# Altium PCB Sensor.PcbDoc (part 3 of 3)
Units mil, origin at the board's own origin, x right, y up, seen from the top; angles counter-clockwise.
Board outline 4000 x 3000 mil, 2 copper layers (Top Layer, Bottom Layer); 1202 components, 71 nets, 2560 pads, 0 vias.
Unrouted connection lines stored in the file: 2489.
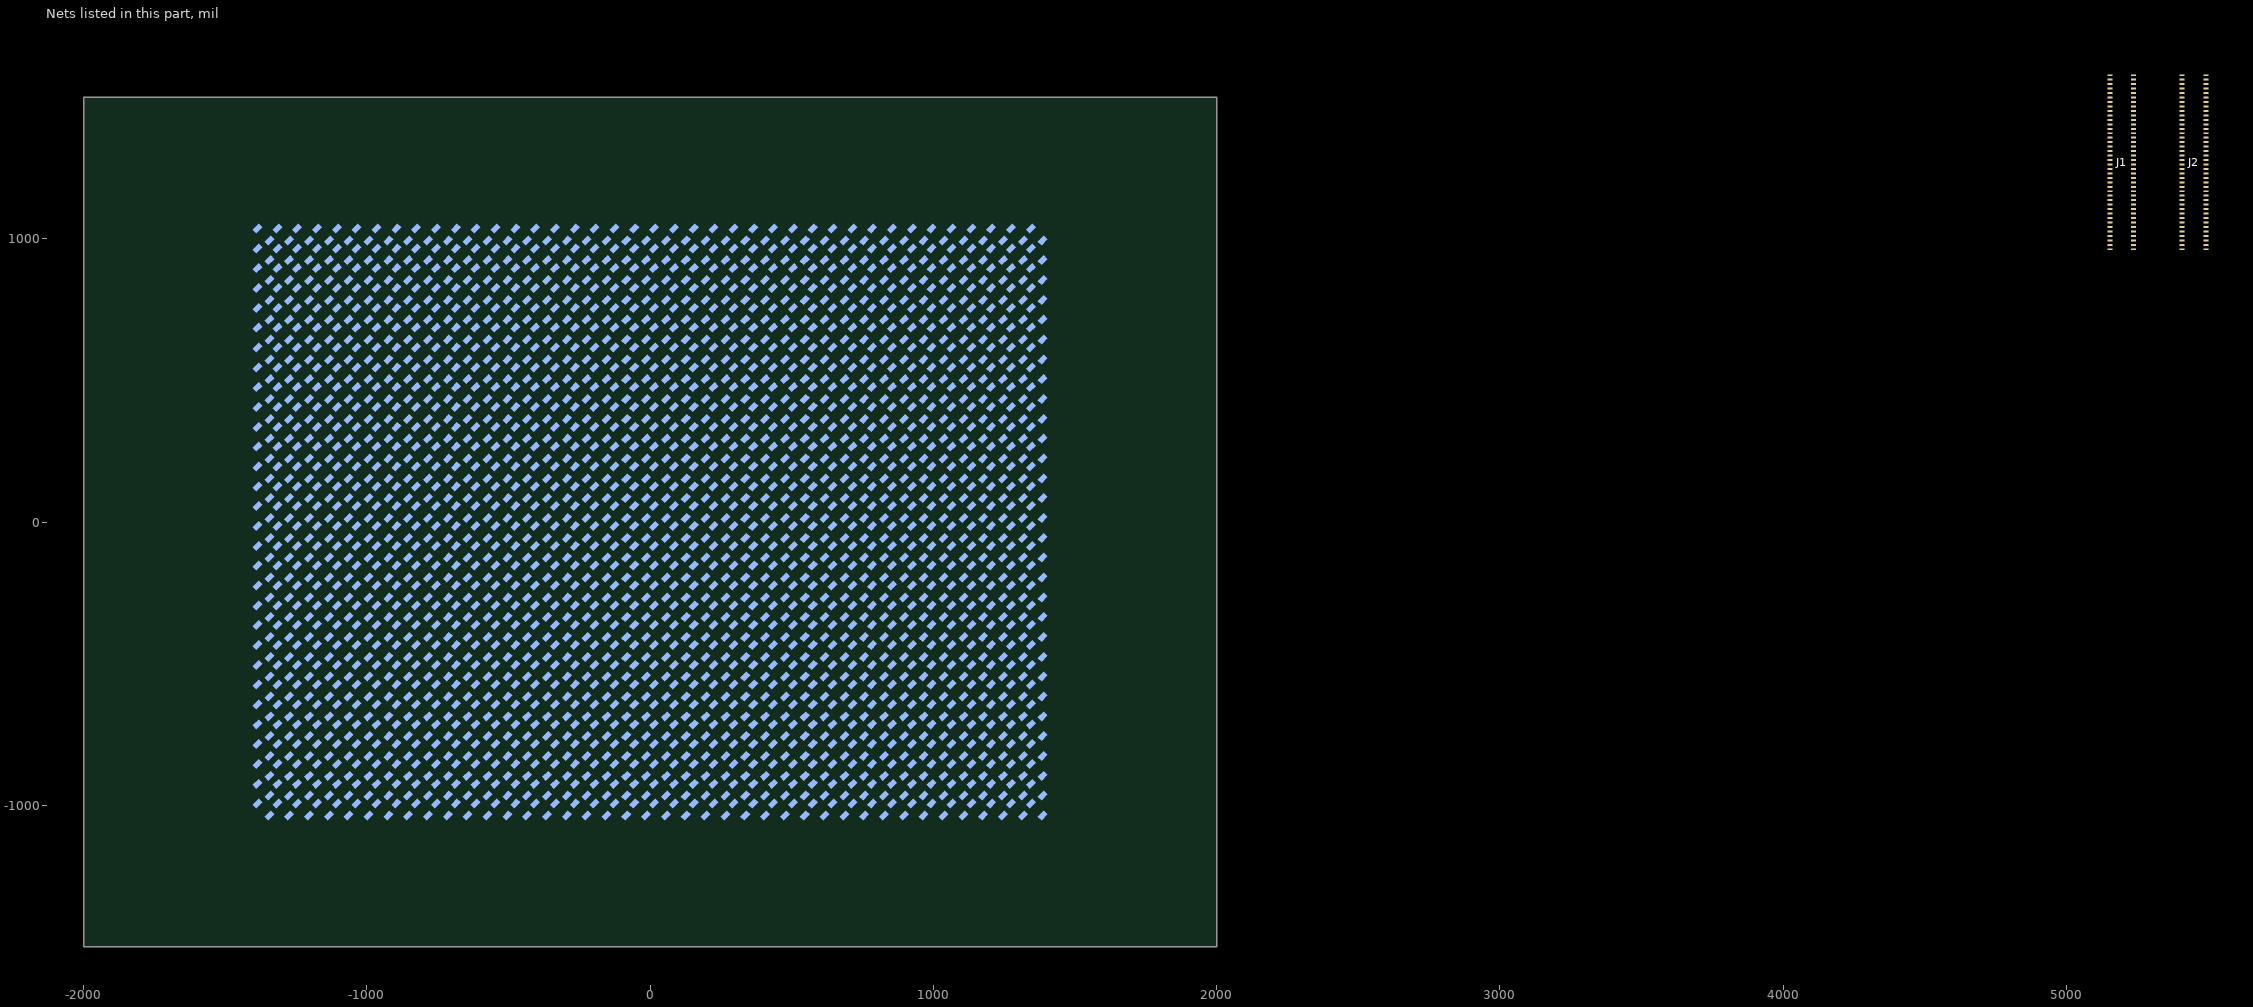
[diagram p3: the nets of this part, all layers, seen from the top]

## Footprints (in the part's own frame and the unit in brackets; to place one, negate y for a bottom-side part, rotate by r counter-clockwise, add the part's x,y. Pads: shape width x height; smd on the part's side, far side on the other; paste and mask are expansions set on the pad)
AXT680124A [mil]
  rect 7x18 smd paste+0 mask+0: 1(-307.12,42.13) 2(-291.38,42.13) 3(-275.62,42.13) 4(-259.88,42.13) 5(-244.12,42.13) 6(-228.38,42.13) 7(-212.62,42.13) 8(-196.88,42.13) 9(-181.12,42.13) 10(-165.38,42.13) 11(-149.62,42.13) 12(-133.88,42.13) 13(-118.12,42.13) 14(-102.38,42.13) 15(-86.62,42.13) 16(-70.88,42.13) 17(-55.12,42.13) 18(-39.38,42.13) 19(-23.63,42.13) 20(-7.88,42.13) 21(7.87,42.13) 22(23.62,42.13) 23(39.38,42.13) 24(55.12,42.13) 25(70.88,42.13) 26(86.62,42.13) 27(102.38,42.13) 28(118.12,42.13) 29(133.88,42.13) 30(149.62,42.13) 31(165.38,42.13) 32(181.12,42.13) 33(196.88,42.13) 34(212.62,42.13) 35(228.38,42.13) 36(244.12,42.13) 37(259.88,42.13) 38(275.62,42.13) 39(291.38,42.13) 40(307.12,42.13) 41(-307.12,-42.13) 42(-291.38,-42.13) 43(-275.62,-42.13) 44(-259.88,-42.13) 45(-244.12,-42.13) 46(-228.38,-42.13) 47(-212.62,-42.13) 48(-196.88,-42.13) 49(-181.12,-42.13) 50(-165.38,-42.13) 51(-149.62,-42.13) 52(-133.88,-42.13) 53(-118.12,-42.13) 54(-102.38,-42.13) 55(-86.62,-42.13) 56(-70.88,-42.13) 57(-55.12,-42.13) 58(-39.38,-42.13) 59(-23.62,-42.13) 60(-7.87,-42.13) 61(7.88,-42.13) 62(23.63,-42.13) 63(39.38,-42.13) 64(55.12,-42.13) 65(70.88,-42.13) 66(86.62,-42.13) 67(102.38,-42.13) 68(118.12,-42.13) 69(133.88,-42.13) 70(149.62,-42.13) 71(165.38,-42.13) 72(181.12,-42.13) 73(196.88,-42.13) 74(212.62,-42.13) 75(228.38,-42.13) 76(244.12,-42.13) 77(259.88,-42.13) 78(275.62,-42.13) 79(291.38,-42.13) 80(307.12,-42.13)
  silkscreen extent -440,-42 356,57
B19H1LS--H9C000114U1930 [mm]
  rect 0.5x0.8 smd: C(-0.75,0) E(0.75,0)
  silkscreen extent -0.13,-0.13 -0.13,0.13

## Part data
J1 J2: library part AXT680124A, "Connector Board Stacker Header 80Position 1mm Stack Height 0.4mm Solder Straight Surface Mount Emboss T/R", Manufacturer=Panasonic, Package Quantity=500, Supplier Part Number=255-5639-ND, Category=Connectors, ComponentLink1Description=http://www3.panasonic.biz/ac/e_download/control/connector/base-fpc/catalog/con_eng_f4s.pdf?src-supplier=Digi-Key, ComponentLink1URL=http://www3.panasonic.biz/ac/e_download/control/connector/base-fpc/catalog/con_eng_f4s.pdf?src-supplier=Digi-Key, Contact Plating=Gold, Manufacturer Part Number=AXT680124A, Mated Stacking Heights=1mm, Mounting Technology="Surface Mount", Number of Positions=80, Number of Rows=2, Packaging="Tape and Reel", Pitch=0.016inch, Pricing="1=2.6, 10=2.267, 25=2.1704, 50=2.1222, 100=2.0257, 250=1.83272, 500=1.68804, 1000=1.4469, 2500=1.35044 (USD)", RoHS=Yes, Stock=267, Supplier=Digi-Key
Q1 Q2 Q3 Q4 Q5 Q6 Q7 Q8 Q9 Q10 Q11 Q12 Q13 Q14 Q15 Q16 Q17 Q18 Q19 Q20 Q21 Q22 Q23 Q24 Q25 Q26 Q27 Q28 Q29 Q30 Q31 Q32 Q33 Q34 Q35 Q36 Q37 Q38 Q39 Q40 Q41 Q42 Q43 Q44 Q45 Q46 Q47 Q48 Q49 Q50 Q51 Q52 Q53 Q54 Q55 Q56 Q57 Q58 Q59 Q60 Q61 Q62 Q63 Q64 Q65 Q66 Q67 Q68 Q69 Q70 Q71 Q72 Q73 Q74 Q75 Q76 Q77 Q78 Q79 Q80 Q81 Q82 Q83 Q84 Q85 Q86 Q87 Q88 Q89 Q90 Q91 Q92 Q93 Q94 Q95 Q96 Q97 Q98 Q99 Q100 Q101 Q102 Q103 Q104 Q105 Q106 Q107 Q108 Q109 Q110 Q111 Q112 Q113 Q114 Q115 Q116 Q117 Q118 Q119 Q120 Q121 Q122 Q123 Q124 Q125 Q126 Q127 Q128 Q129 Q130 Q131 Q132 Q133 Q134 Q135 Q136 Q137 Q138 Q139 Q140 Q141 Q142 Q143 Q144 Q145 Q146 Q147 Q148 Q149 Q150 Q151 Q152 Q153 Q154 Q155 Q156 Q157 Q158 Q159 Q160 Q161 Q162 Q163 Q164 Q165 Q166 Q167 Q168 Q169 Q170 Q171 Q172 Q173 Q174 Q175 Q176 Q177 Q178 Q179 Q180 Q181 Q182 Q183 Q184 Q185 Q186 Q187 Q188 Q189 Q190 Q191 Q192 Q193 Q194 Q195 Q196 Q197 Q198 Q199 Q200 Q201 Q202 Q203 Q204 Q205 Q206 Q207 Q208 Q209 Q210 Q211 Q212 Q213 Q214 Q215 Q216 Q217 Q218 Q219 Q220 Q221 Q222 Q223 Q224 Q225 Q226 Q227 Q228 Q229 Q230 Q231 Q232 Q233 Q234 Q235 Q236 Q237 Q238 Q239 Q240 Q241 Q242 Q243 Q244 Q245 Q246 Q247 Q248 Q249 Q250 Q251 Q252 Q253 Q254 Q255 Q256 Q257 Q258 Q259 Q260 Q261 Q262 Q263 Q264 Q265 Q266 Q267 Q268 Q269 Q270 Q271 Q272 Q273 Q274 Q275 Q276 Q277 Q278 Q279 Q280 Q281 Q282 Q283 Q284 Q285 Q286 Q287 Q288 Q289 Q290 Q291 Q292 Q293 Q294 Q295 Q296 Q297 Q298 Q299 Q300 Q301 Q302 Q303 Q304 Q305 Q306 Q307 Q308 Q309 Q310 Q311 Q312 Q313 Q314 Q315 Q316 Q317 Q318 Q319 Q320 Q321 Q322 Q323 Q324 Q325 Q326 Q327 Q328 Q329 Q330 Q331 Q332 Q333 Q334 Q335 Q336 Q337 Q338 Q339 Q340 Q341 Q342 Q343 Q344 Q345 Q346 Q347 Q348 Q349 Q350 Q351 Q352 Q353 Q354 Q355 Q356 Q357 Q358 Q359 Q360 Q361 Q362 Q363 Q364 Q365 Q366 Q367 Q368 Q369 Q370 Q371 Q372 Q373 Q374 Q375 Q376 Q377 Q378 Q379 Q380 Q381 Q382 Q383 Q384 Q385 Q386 Q387 Q388 Q389 Q390 Q391 Q392 Q393 Q394 Q395 Q396 Q397 Q398 Q399 Q400 Q401 Q402 Q403 Q404 Q405 Q406 Q407 Q408 Q409 Q410 Q411 Q412 Q413 Q414 Q415 Q416 Q417 Q418 Q419 Q420 Q421 Q422 Q423 Q424 Q425 Q426 Q427 Q428 Q429 Q430 Q431 Q432 Q433 Q434 Q435 Q436 Q437 Q438 Q439 Q440 Q441 Q442 Q443 Q444 Q445 Q446 Q447 Q448 Q449 Q450 Q451 Q452 Q453 Q454 Q455 Q456 Q457 Q458 Q459 Q460 Q461 Q462 Q463 Q464 Q465 Q466 Q467 Q468 Q469 Q470 Q471 Q472 Q473 Q474 Q475 Q476 Q477 Q478 Q479 Q480 Q481 Q482 Q483 Q484 Q485 Q486 Q487 Q488 Q489 Q490 Q491 Q492 Q493 Q494 Q495 Q496 Q497 Q498 Q499 Q500 Q501 Q502 Q503 Q504 Q505 Q506 Q507 Q508 Q509 Q510 Q511 Q512 Q513 Q514 Q515 Q516 Q517 Q518 Q519 Q520 Q521 Q522 Q523 Q524 Q525 Q526 Q527 Q528 Q529 Q530 Q531 Q532 Q533 Q534 Q535 Q536 Q537 Q538 Q539 Q540 Q541 Q542 Q543 Q544 Q545 Q546 Q547 Q548 Q549 Q550 Q551 Q552 Q553 Q554 Q555 Q556 Q557 Q558 Q559 Q560 Q561 Q562 Q563 Q564 Q565 Q566 Q567 Q568 Q569 Q570 Q571 Q572 Q573 Q574 Q575 Q576 Q577 Q578 Q579 Q580 Q581 Q582 Q583 Q584 Q585 Q586 Q587 Q588 Q589 Q590 Q591 Q592 Q593 Q594 Q595 Q596 Q597 Q598 Q599 Q600 Q601 Q602 Q603 Q604 Q605 Q606 Q607 Q608 Q609 Q610 Q611 Q612 Q613 Q614 Q615 Q616 Q617 Q618 Q619 Q620 Q621 Q622 Q623 Q624 Q625 Q626 Q627 Q628 Q629 Q630 Q631 Q632 Q633 Q634 Q635 Q636 Q637 Q638 Q639 Q640 Q641 Q642 Q643 Q644 Q645 Q646 Q647 Q648 Q649 Q650 Q651 Q652 Q653 Q654 Q655 Q656 Q657 Q658 Q659 Q660 Q661 Q662 Q663 Q664 Q665 Q666 Q667 Q668 Q669 Q670 Q671 Q672 Q673 Q674 Q675 Q676 Q677 Q678 Q679 Q680 Q681 Q682 Q683 Q684 Q685 Q686 Q687 Q688 Q689 Q690 Q691 Q692 Q693 Q694 Q695 Q696 Q697 Q698 Q699 Q700 Q701 Q702 Q703 Q704 Q705 Q706 Q707 Q708 Q709 Q710 Q711 Q712 Q713 Q714 Q715 Q716 Q717 Q718 Q719 Q720 Q721 Q722 Q723 Q724 Q725 Q726 Q727 Q728 Q729 Q730 Q731 Q732 Q733 Q734 Q735 Q736 Q737 Q738 Q739 Q740 Q741 Q742 Q743 Q744 Q745 Q746 Q747 Q748 Q749 Q750 Q751 Q752 Q753 Q754 Q755 Q756 Q757 Q758 Q759 Q760 Q761 Q762 Q763 Q764 Q765 Q766 Q767 Q768 Q769 Q770 Q771 Q772 Q773 Q774 Q775 Q776 Q777 Q778 Q779 Q780 Q781 Q782 Q783 Q784 Q785 Q786 Q787 Q788 Q789 Q790 Q791 Q792 Q793 Q794 Q795 Q796 Q797 Q798 Q799 Q800 Q801 Q802 Q803 Q804 Q805 Q806 Q807 Q808 Q809 Q810 Q811 Q812 Q813 Q814 Q815 Q816 Q817 Q818 Q819 Q820 Q821 Q822 Q823 Q824 Q825 Q826 Q827 Q828 Q829 Q830 Q831 Q832 Q833 Q834 Q835 Q836 Q837 Q838 Q839 Q840 Q841 Q842 Q843 Q844 Q845 Q846 Q847 Q848 Q849 Q850 Q851 Q852 Q853 Q854 Q855 Q856 Q857 Q858 Q859 Q860 Q861 Q862 Q863 Q864 Q865 Q866 Q867 Q868 Q869 Q870 Q871 Q872 Q873 Q874 Q875 Q876 Q877 Q878 Q879 Q880 Q881 Q882 Q883 Q884 Q885 Q886 Q887 Q888 Q889 Q890 Q891 Q892 Q893 Q894 Q895 Q896 Q897 Q898 Q899 Q900 Q901 Q902 Q903 Q904 Q905 Q906 Q907 Q908 Q909 Q910 Q911 Q912 Q913 Q914 Q915 Q916 Q917 Q918 Q919 Q920 Q921 Q922 Q923 Q924 Q925 Q926 Q927 Q928 Q929 Q930 Q931 Q932 Q933 Q934 Q935 Q936 Q937 Q938 Q939 Q940 Q941 Q942 Q943 Q944 Q945 Q946 Q947 Q948 Q949 Q950 Q951 Q952 Q953 Q954 Q955 Q956 Q957 Q958 Q959 Q960 Q961 Q962 Q963 Q964 Q965 Q966 Q967 Q968 Q969 Q970 Q971 Q972 Q973 Q974 Q975 Q976 Q977 Q978 Q979 Q980 Q981 Q982 Q983 Q984 Q985 Q986 Q987 Q988 Q989 Q990 Q991 Q992 Q993 Q994 Q995 Q996 Q997 Q998 Q999 Q1000 Q1001 Q1002 Q1003 Q1004 Q1005 Q1006 Q1007 Q1008 Q1009 Q1010 Q1011 Q1012 Q1013 Q1014 Q1015 Q1016 Q1017 Q1018 Q1019 Q1020 Q1021 Q1022 Q1023 Q1024 Q1025 Q1026 Q1027 Q1028 Q1029 Q1030 Q1031 Q1032 Q1033 Q1034 Q1035 Q1036 Q1037 Q1038 Q1039 Q1040 Q1041 Q1042 Q1043 Q1044 Q1045 Q1046 Q1047 Q1048 Q1049 Q1050 Q1051 Q1052 Q1053 Q1054 Q1055 Q1056 Q1057 Q1058 Q1059 Q1060 Q1061 Q1062 Q1063 Q1064 Q1065 Q1066 Q1067 Q1068 Q1069 Q1070 Q1071 Q1072 Q1073 Q1074 Q1075 Q1076 Q1077 Q1078 Q1079 Q1080 Q1081 Q1082 Q1083 Q1084 Q1085 Q1086 Q1087 Q1088 Q1089 Q1090 Q1091 Q1092 Q1093 Q1094 Q1095 Q1096 Q1097 Q1098 Q1099 Q1100 Q1101 Q1102 Q1103 Q1104 Q1105 Q1106 Q1107 Q1108 Q1109 Q1110 Q1111 Q1112 Q1113 Q1114 Q1115 Q1116 Q1117 Q1118 Q1119 Q1120 Q1121 Q1122 Q1123 Q1124 Q1125 Q1126 Q1127 Q1128 Q1129 Q1130 Q1131 Q1132 Q1133 Q1134 Q1135 Q1136 Q1137 Q1138 Q1139 Q1140 Q1141 Q1142 Q1143 Q1144 Q1145 Q1146 Q1147 Q1148 Q1149 Q1150 Q1151 Q1152 Q1153 Q1154 Q1155 Q1156 Q1157 Q1158 Q1159 Q1160 Q1161 Q1162 Q1163 Q1164 Q1165 Q1166 Q1167 Q1168 Q1169 Q1170 Q1171 Q1172 Q1173 Q1174 Q1175 Q1176 Q1177 Q1178 Q1179 Q1180 Q1181 Q1182 Q1183 Q1184 Q1185 Q1186 Q1187 Q1188 Q1189 Q1190 Q1191 Q1192 Q1193 Q1194 Q1195 Q1196 Q1197 Q1198 Q1199 Q1200: "1.6(L)X0.8(W)X0.88(H) Mm Light S", Manufacturer=Inolux, Supplier Part Number=3147-B19H1LS--H9C000114U1930CT-ND, Category=Uncategorized, Manufacturer Part Number=B19H1LS--H9C000114U1930, RoHS=No, Supplier=Digi-Key

## Nets (pads, with @x,y where several pads share a name; then routed paths per layer and width w, separated by ;. In a path a pad name is that pad's centre, name@x,y a point inside that pad or via, vN(x,y) a via of type N, cw(c..) or ccw(c..) an arc to the next point about the centre after c; other vN are vias at no path point)
COL_0: J1.1 Q1.C Q41.C Q81.C Q121.C Q161.C Q201.C Q241.C Q281.C Q321.C Q361.C Q401.C Q441.C Q481.C Q521.C Q561.C Q601.C Q641.C Q681.C Q721.C Q761.C Q801.C Q841.C Q881.C Q921.C Q961.C Q1001.C Q1041.C Q1081.C Q1121.C Q1161.C
COL_1: J1.3 Q2.C Q42.C Q82.C Q122.C Q162.C Q202.C Q242.C Q282.C Q322.C Q362.C Q402.C Q442.C Q482.C Q522.C Q562.C Q602.C Q642.C Q682.C Q722.C Q762.C Q802.C Q842.C Q882.C Q922.C Q962.C Q1002.C Q1042.C Q1082.C Q1122.C Q1162.C
COL_2: J1.5 Q3.C Q43.C Q83.C Q123.C Q163.C Q203.C Q243.C Q283.C Q323.C Q363.C Q403.C Q443.C Q483.C Q523.C Q563.C Q603.C Q643.C Q683.C Q723.C Q763.C Q803.C Q843.C Q883.C Q923.C Q963.C Q1003.C Q1043.C Q1083.C Q1123.C Q1163.C
COL_3: J1.7 Q4.C Q44.C Q84.C Q124.C Q164.C Q204.C Q244.C Q284.C Q324.C Q364.C Q404.C Q444.C Q484.C Q524.C Q564.C Q604.C Q644.C Q684.C Q724.C Q764.C Q804.C Q844.C Q884.C Q924.C Q964.C Q1004.C Q1044.C Q1084.C Q1124.C Q1164.C
COL_4: J1.9 Q5.C Q45.C Q85.C Q125.C Q165.C Q205.C Q245.C Q285.C Q325.C Q365.C Q405.C Q445.C Q485.C Q525.C Q565.C Q605.C Q645.C Q685.C Q725.C Q765.C Q805.C Q845.C Q885.C Q925.C Q965.C Q1005.C Q1045.C Q1085.C Q1125.C Q1165.C
COL_5: J1.11 Q6.C Q46.C Q86.C Q126.C Q166.C Q206.C Q246.C Q286.C Q326.C Q366.C Q406.C Q446.C Q486.C Q526.C Q566.C Q606.C Q646.C Q686.C Q726.C Q766.C Q806.C Q846.C Q886.C Q926.C Q966.C Q1006.C Q1046.C Q1086.C Q1126.C Q1166.C
COL_6: J1.13 Q7.C Q47.C Q87.C Q127.C Q167.C Q207.C Q247.C Q287.C Q327.C Q367.C Q407.C Q447.C Q487.C Q527.C Q567.C Q607.C Q647.C Q687.C Q727.C Q767.C Q807.C Q847.C Q887.C Q927.C Q967.C Q1007.C Q1047.C Q1087.C Q1127.C Q1167.C
COL_7: J1.15 Q8.C Q48.C Q88.C Q128.C Q168.C Q208.C Q248.C Q288.C Q328.C Q368.C Q408.C Q448.C Q488.C Q528.C Q568.C Q608.C Q648.C Q688.C Q728.C Q768.C Q808.C Q848.C Q888.C Q928.C Q968.C Q1008.C Q1048.C Q1088.C Q1128.C Q1168.C
COL_8: J1.17 Q9.C Q49.C Q89.C Q129.C Q169.C Q209.C Q249.C Q289.C Q329.C Q369.C Q409.C Q449.C Q489.C Q529.C Q569.C Q609.C Q649.C Q689.C Q729.C Q769.C Q809.C Q849.C Q889.C Q929.C Q969.C Q1009.C Q1049.C Q1089.C Q1129.C Q1169.C
COL_9: J1.19 Q10.C Q50.C Q90.C Q130.C Q170.C Q210.C Q250.C Q290.C Q330.C Q370.C Q410.C Q450.C Q490.C Q530.C Q570.C Q610.C Q650.C Q690.C Q730.C Q770.C Q810.C Q850.C Q890.C Q930.C Q970.C Q1010.C Q1050.C Q1090.C Q1130.C Q1170.C
COL_10: J1.21 Q11.C Q51.C Q91.C Q131.C Q171.C Q211.C Q251.C Q291.C Q331.C Q371.C Q411.C Q451.C Q491.C Q531.C Q571.C Q611.C Q651.C Q691.C Q731.C Q771.C Q811.C Q851.C Q891.C Q931.C Q971.C Q1011.C Q1051.C Q1091.C Q1131.C Q1171.C
COL_11: J1.23 Q12.C Q52.C Q92.C Q132.C Q172.C Q212.C Q252.C Q292.C Q332.C Q372.C Q412.C Q452.C Q492.C Q532.C Q572.C Q612.C Q652.C Q692.C Q732.C Q772.C Q812.C Q852.C Q892.C Q932.C Q972.C Q1012.C Q1052.C Q1092.C Q1132.C Q1172.C
COL_12: J1.25 Q13.C Q53.C Q93.C Q133.C Q173.C Q213.C Q253.C Q293.C Q333.C Q373.C Q413.C Q453.C Q493.C Q533.C Q573.C Q613.C Q653.C Q693.C Q733.C Q773.C Q813.C Q853.C Q893.C Q933.C Q973.C Q1013.C Q1053.C Q1093.C Q1133.C Q1173.C
COL_13: J1.27 Q14.C Q54.C Q94.C Q134.C Q174.C Q214.C Q254.C Q294.C Q334.C Q374.C Q414.C Q454.C Q494.C Q534.C Q574.C Q614.C Q654.C Q694.C Q734.C Q774.C Q814.C Q854.C Q894.C Q934.C Q974.C Q1014.C Q1054.C Q1094.C Q1134.C Q1174.C
COL_14: J1.29 Q15.C Q55.C Q95.C Q135.C Q175.C Q215.C Q255.C Q295.C Q335.C Q375.C Q415.C Q455.C Q495.C Q535.C Q575.C Q615.C Q655.C Q695.C Q735.C Q775.C Q815.C Q855.C Q895.C Q935.C Q975.C Q1015.C Q1055.C Q1095.C Q1135.C Q1175.C
COL_15: J1.31 Q16.C Q56.C Q96.C Q136.C Q176.C Q216.C Q256.C Q296.C Q336.C Q376.C Q416.C Q456.C Q496.C Q536.C Q576.C Q616.C Q656.C Q696.C Q736.C Q776.C Q816.C Q856.C Q896.C Q936.C Q976.C Q1016.C Q1056.C Q1096.C Q1136.C Q1176.C
COL_16: J1.33 Q17.C Q57.C Q97.C Q137.C Q177.C Q217.C Q257.C Q297.C Q337.C Q377.C Q417.C Q457.C Q497.C Q537.C Q577.C Q617.C Q657.C Q697.C Q737.C Q777.C Q817.C Q857.C Q897.C Q937.C Q977.C Q1017.C Q1057.C Q1097.C Q1137.C Q1177.C
COL_17: J1.35 Q18.C Q58.C Q98.C Q138.C Q178.C Q218.C Q258.C Q298.C Q338.C Q378.C Q418.C Q458.C Q498.C Q538.C Q578.C Q618.C Q658.C Q698.C Q738.C Q778.C Q818.C Q858.C Q898.C Q938.C Q978.C Q1018.C Q1058.C Q1098.C Q1138.C Q1178.C
COL_18: J1.37 Q19.C Q59.C Q99.C Q139.C Q179.C Q219.C Q259.C Q299.C Q339.C Q379.C Q419.C Q459.C Q499.C Q539.C Q579.C Q619.C Q659.C Q699.C Q739.C Q779.C Q819.C Q859.C Q899.C Q939.C Q979.C Q1019.C Q1059.C Q1099.C Q1139.C Q1179.C
COL_19: J1.39 Q20.C Q60.C Q100.C Q140.C Q180.C Q220.C Q260.C Q300.C Q340.C Q380.C Q420.C Q460.C Q500.C Q540.C Q580.C Q620.C Q660.C Q700.C Q740.C Q780.C Q820.C Q860.C Q900.C Q940.C Q980.C Q1020.C Q1060.C Q1100.C Q1140.C Q1180.C
COL_20: J1.42 Q21.C Q61.C Q101.C Q141.C Q181.C Q221.C Q261.C Q301.C Q341.C Q381.C Q421.C Q461.C Q501.C Q541.C Q581.C Q621.C Q661.C Q701.C Q741.C Q781.C Q821.C Q861.C Q901.C Q941.C Q981.C Q1021.C Q1061.C Q1101.C Q1141.C Q1181.C
COL_21: J1.44 Q22.C Q62.C Q102.C Q142.C Q182.C Q222.C Q262.C Q302.C Q342.C Q382.C Q422.C Q462.C Q502.C Q542.C Q582.C Q622.C Q662.C Q702.C Q742.C Q782.C Q822.C Q862.C Q902.C Q942.C Q982.C Q1022.C Q1062.C Q1102.C Q1142.C Q1182.C
COL_22: J1.46 Q23.C Q63.C Q103.C Q143.C Q183.C Q223.C Q263.C Q303.C Q343.C Q383.C Q423.C Q463.C Q503.C Q543.C Q583.C Q623.C Q663.C Q703.C Q743.C Q783.C Q823.C Q863.C Q903.C Q943.C Q983.C Q1023.C Q1063.C Q1103.C Q1143.C Q1183.C
COL_23: J1.48 Q24.C Q64.C Q104.C Q144.C Q184.C Q224.C Q264.C Q304.C Q344.C Q384.C Q424.C Q464.C Q504.C Q544.C Q584.C Q624.C Q664.C Q704.C Q744.C Q784.C Q824.C Q864.C Q904.C Q944.C Q984.C Q1024.C Q1064.C Q1104.C Q1144.C Q1184.C
COL_24: J1.50 Q25.C Q65.C Q105.C Q145.C Q185.C Q225.C Q265.C Q305.C Q345.C Q385.C Q425.C Q465.C Q505.C Q545.C Q585.C Q625.C Q665.C Q705.C Q745.C Q785.C Q825.C Q865.C Q905.C Q945.C Q985.C Q1025.C Q1065.C Q1105.C Q1145.C Q1185.C
COL_25: J1.52 Q26.C Q66.C Q106.C Q146.C Q186.C Q226.C Q266.C Q306.C Q346.C Q386.C Q426.C Q466.C Q506.C Q546.C Q586.C Q626.C Q666.C Q706.C Q746.C Q786.C Q826.C Q866.C Q906.C Q946.C Q986.C Q1026.C Q1066.C Q1106.C Q1146.C Q1186.C
COL_26: J1.54 Q27.C Q67.C Q107.C Q147.C Q187.C Q227.C Q267.C Q307.C Q347.C Q387.C Q427.C Q467.C Q507.C Q547.C Q587.C Q627.C Q667.C Q707.C Q747.C Q787.C Q827.C Q867.C Q907.C Q947.C Q987.C Q1027.C Q1067.C Q1107.C Q1147.C Q1187.C
COL_27: J1.56 Q28.C Q68.C Q108.C Q148.C Q188.C Q228.C Q268.C Q308.C Q348.C Q388.C Q428.C Q468.C Q508.C Q548.C Q588.C Q628.C Q668.C Q708.C Q748.C Q788.C Q828.C Q868.C Q908.C Q948.C Q988.C Q1028.C Q1068.C Q1108.C Q1148.C Q1188.C
COL_28: J1.58 Q29.C Q69.C Q109.C Q149.C Q189.C Q229.C Q269.C Q309.C Q349.C Q389.C Q429.C Q469.C Q509.C Q549.C Q589.C Q629.C Q669.C Q709.C Q749.C Q789.C Q829.C Q869.C Q909.C Q949.C Q989.C Q1029.C Q1069.C Q1109.C Q1149.C Q1189.C
COL_29: J1.60 Q30.C Q70.C Q110.C Q150.C Q190.C Q230.C Q270.C Q310.C Q350.C Q390.C Q430.C Q470.C Q510.C Q550.C Q590.C Q630.C Q670.C Q710.C Q750.C Q790.C Q830.C Q870.C Q910.C Q950.C Q990.C Q1030.C Q1070.C Q1110.C Q1150.C Q1190.C
COL_30: J1.62 Q31.C Q71.C Q111.C Q151.C Q191.C Q231.C Q271.C Q311.C Q351.C Q391.C Q431.C Q471.C Q511.C Q551.C Q591.C Q631.C Q671.C Q711.C Q751.C Q791.C Q831.C Q871.C Q911.C Q951.C Q991.C Q1031.C Q1071.C Q1111.C Q1151.C Q1191.C
COL_31: J1.64 Q32.C Q72.C Q112.C Q152.C Q192.C Q232.C Q272.C Q312.C Q352.C Q392.C Q432.C Q472.C Q512.C Q552.C Q592.C Q632.C Q672.C Q712.C Q752.C Q792.C Q832.C Q872.C Q912.C Q952.C Q992.C Q1032.C Q1072.C Q1112.C Q1152.C Q1192.C
COL_32: J1.66 Q33.C Q73.C Q113.C Q153.C Q193.C Q233.C Q273.C Q313.C Q353.C Q393.C Q433.C Q473.C Q513.C Q553.C Q593.C Q633.C Q673.C Q713.C Q753.C Q793.C Q833.C Q873.C Q913.C Q953.C Q993.C Q1033.C Q1073.C Q1113.C Q1153.C Q1193.C
COL_33: J1.68 Q34.C Q74.C Q114.C Q154.C Q194.C Q234.C Q274.C Q314.C Q354.C Q394.C Q434.C Q474.C Q514.C Q554.C Q594.C Q634.C Q674.C Q714.C Q754.C Q794.C Q834.C Q874.C Q914.C Q954.C Q994.C Q1034.C Q1074.C Q1114.C Q1154.C Q1194.C
COL_34: J1.70 Q35.C Q75.C Q115.C Q155.C Q195.C Q235.C Q275.C Q315.C Q355.C Q395.C Q435.C Q475.C Q515.C Q555.C Q595.C Q635.C Q675.C Q715.C Q755.C Q795.C Q835.C Q875.C Q915.C Q955.C Q995.C Q1035.C Q1075.C Q1115.C Q1155.C Q1195.C
COL_35: J1.72 Q36.C Q76.C Q116.C Q156.C Q196.C Q236.C Q276.C Q316.C Q356.C Q396.C Q436.C Q476.C Q516.C Q556.C Q596.C Q636.C Q676.C Q716.C Q756.C Q796.C Q836.C Q876.C Q916.C Q956.C Q996.C Q1036.C Q1076.C Q1116.C Q1156.C Q1196.C
COL_36: J1.74 Q37.C Q77.C Q117.C Q157.C Q197.C Q237.C Q277.C Q317.C Q357.C Q397.C Q437.C Q477.C Q517.C Q557.C Q597.C Q637.C Q677.C Q717.C Q757.C Q797.C Q837.C Q877.C Q917.C Q957.C Q997.C Q1037.C Q1077.C Q1117.C Q1157.C Q1197.C
COL_37: J1.76 Q38.C Q78.C Q118.C Q158.C Q198.C Q238.C Q278.C Q318.C Q358.C Q398.C Q438.C Q478.C Q518.C Q558.C Q598.C Q638.C Q678.C Q718.C Q758.C Q798.C Q838.C Q878.C Q918.C Q958.C Q998.C Q1038.C Q1078.C Q1118.C Q1158.C Q1198.C
COL_38: J1.78 Q39.C Q79.C Q119.C Q159.C Q199.C Q239.C Q279.C Q319.C Q359.C Q399.C Q439.C Q479.C Q519.C Q559.C Q599.C Q639.C Q679.C Q719.C Q759.C Q799.C Q839.C Q879.C Q919.C Q959.C Q999.C Q1039.C Q1079.C Q1119.C Q1159.C Q1199.C
COL_39: J1.80 Q40.C Q80.C Q120.C Q160.C Q200.C Q240.C Q280.C Q320.C Q360.C Q400.C Q440.C Q480.C Q520.C Q560.C Q600.C Q640.C Q680.C Q720.C Q760.C Q800.C Q840.C Q880.C Q920.C Q960.C Q1000.C Q1040.C Q1080.C Q1120.C Q1160.C Q1200.C
GND: J1.2 J1.4 J1.6 J1.8 J1.10 J1.12 J1.14 J1.16 J1.18 J1.20 J1.22 J1.24 J1.26 J1.28 J1.30 J1.32 J1.34 J1.36 J1.38 J1.40 J1.41 J1.43 J1.45 J1.47 J1.49 J1.51 J1.53 J1.55 J1.57 J1.59 J1.61 J1.63 J1.65 J1.67 J1.69 J1.71 J1.73 J1.75 J1.77 J1.79 J2.2 J2.4 J2.6 J2.8 J2.10 J2.12 J2.14 J2.16 J2.18 J2.20 J2.22 J2.24 J2.26 J2.28 J2.30 J2.32 J2.34 J2.36 J2.38 J2.40 J2.41 J2.43 J2.45 J2.47 J2.49 J2.51 J2.53 J2.55 J2.57 J2.59 J2.61 J2.62 J2.63 J2.64 J2.65 J2.66 J2.67 J2.68 J2.69 J2.70 J2.71 J2.72 J2.73 J2.74 J2.75 J2.76 J2.77 J2.78 J2.79 J2.80
ROW_0: J2.1 Q1.E Q2.E Q3.E Q4.E Q5.E Q6.E Q7.E Q8.E Q9.E Q10.E Q11.E Q12.E Q13.E Q14.E Q15.E Q16.E Q17.E Q18.E Q19.E Q20.E Q21.E Q22.E Q23.E Q24.E Q25.E Q26.E Q27.E Q28.E Q29.E Q30.E Q31.E Q32.E Q33.E Q34.E Q35.E Q36.E Q37.E Q38.E Q39.E Q40.E
ROW_1: J2.3 Q41.E Q42.E Q43.E Q44.E Q45.E Q46.E Q47.E Q48.E Q49.E Q50.E Q51.E Q52.E Q53.E Q54.E Q55.E Q56.E Q57.E Q58.E Q59.E Q60.E Q61.E Q62.E Q63.E Q64.E Q65.E Q66.E Q67.E Q68.E Q69.E Q70.E Q71.E Q72.E Q73.E Q74.E Q75.E Q76.E Q77.E Q78.E Q79.E Q80.E
ROW_2: J2.5 Q81.E Q82.E Q83.E Q84.E Q85.E Q86.E Q87.E Q88.E Q89.E Q90.E Q91.E Q92.E Q93.E Q94.E Q95.E Q96.E Q97.E Q98.E Q99.E Q100.E Q101.E Q102.E Q103.E Q104.E Q105.E Q106.E Q107.E Q108.E Q109.E Q110.E Q111.E Q112.E Q113.E Q114.E Q115.E Q116.E Q117.E Q118.E Q119.E Q120.E
ROW_3: J2.7 Q121.E Q122.E Q123.E Q124.E Q125.E Q126.E Q127.E Q128.E Q129.E Q130.E Q131.E Q132.E Q133.E Q134.E Q135.E Q136.E Q137.E Q138.E Q139.E Q140.E Q141.E Q142.E Q143.E Q144.E Q145.E Q146.E Q147.E Q148.E Q149.E Q150.E Q151.E Q152.E Q153.E Q154.E Q155.E Q156.E Q157.E Q158.E Q159.E Q160.E
ROW_4: J2.9 Q161.E Q162.E Q163.E Q164.E Q165.E Q166.E Q167.E Q168.E Q169.E Q170.E Q171.E Q172.E Q173.E Q174.E Q175.E Q176.E Q177.E Q178.E Q179.E Q180.E Q181.E Q182.E Q183.E Q184.E Q185.E Q186.E Q187.E Q188.E Q189.E Q190.E Q191.E Q192.E Q193.E Q194.E Q195.E Q196.E Q197.E Q198.E Q199.E Q200.E
ROW_5: J2.11 Q201.E Q202.E Q203.E Q204.E Q205.E Q206.E Q207.E Q208.E Q209.E Q210.E Q211.E Q212.E Q213.E Q214.E Q215.E Q216.E Q217.E Q218.E Q219.E Q220.E Q221.E Q222.E Q223.E Q224.E Q225.E Q226.E Q227.E Q228.E Q229.E Q230.E Q231.E Q232.E Q233.E Q234.E Q235.E Q236.E Q237.E Q238.E Q239.E Q240.E
ROW_6: J2.13 Q241.E Q242.E Q243.E Q244.E Q245.E Q246.E Q247.E Q248.E Q249.E Q250.E Q251.E Q252.E Q253.E Q254.E Q255.E Q256.E Q257.E Q258.E Q259.E Q260.E Q261.E Q262.E Q263.E Q264.E Q265.E Q266.E Q267.E Q268.E Q269.E Q270.E Q271.E Q272.E Q273.E Q274.E Q275.E Q276.E Q277.E Q278.E Q279.E Q280.E
ROW_7: J2.15 Q281.E Q282.E Q283.E Q284.E Q285.E Q286.E Q287.E Q288.E Q289.E Q290.E Q291.E Q292.E Q293.E Q294.E Q295.E Q296.E Q297.E Q298.E Q299.E Q300.E Q301.E Q302.E Q303.E Q304.E Q305.E Q306.E Q307.E Q308.E Q309.E Q310.E Q311.E Q312.E Q313.E Q314.E Q315.E Q316.E Q317.E Q318.E Q319.E Q320.E
ROW_8: J2.17 Q321.E Q322.E Q323.E Q324.E Q325.E Q326.E Q327.E Q328.E Q329.E Q330.E Q331.E Q332.E Q333.E Q334.E Q335.E Q336.E Q337.E Q338.E Q339.E Q340.E Q341.E Q342.E Q343.E Q344.E Q345.E Q346.E Q347.E Q348.E Q349.E Q350.E Q351.E Q352.E Q353.E Q354.E Q355.E Q356.E Q357.E Q358.E Q359.E Q360.E
ROW_9: J2.19 Q361.E Q362.E Q363.E Q364.E Q365.E Q366.E Q367.E Q368.E Q369.E Q370.E Q371.E Q372.E Q373.E Q374.E Q375.E Q376.E Q377.E Q378.E Q379.E Q380.E Q381.E Q382.E Q383.E Q384.E Q385.E Q386.E Q387.E Q388.E Q389.E Q390.E Q391.E Q392.E Q393.E Q394.E Q395.E Q396.E Q397.E Q398.E Q399.E Q400.E
ROW_10: J2.21 Q401.E Q402.E Q403.E Q404.E Q405.E Q406.E Q407.E Q408.E Q409.E Q410.E Q411.E Q412.E Q413.E Q414.E Q415.E Q416.E Q417.E Q418.E Q419.E Q420.E Q421.E Q422.E Q423.E Q424.E Q425.E Q426.E Q427.E Q428.E Q429.E Q430.E Q431.E Q432.E Q433.E Q434.E Q435.E Q436.E Q437.E Q438.E Q439.E Q440.E
ROW_11: J2.23 Q441.E Q442.E Q443.E Q444.E Q445.E Q446.E Q447.E Q448.E Q449.E Q450.E Q451.E Q452.E Q453.E Q454.E Q455.E Q456.E Q457.E Q458.E Q459.E Q460.E Q461.E Q462.E Q463.E Q464.E Q465.E Q466.E Q467.E Q468.E Q469.E Q470.E Q471.E Q472.E Q473.E Q474.E Q475.E Q476.E Q477.E Q478.E Q479.E Q480.E
ROW_12: J2.25 Q481.E Q482.E Q483.E Q484.E Q485.E Q486.E Q487.E Q488.E Q489.E Q490.E Q491.E Q492.E Q493.E Q494.E Q495.E Q496.E Q497.E Q498.E Q499.E Q500.E Q501.E Q502.E Q503.E Q504.E Q505.E Q506.E Q507.E Q508.E Q509.E Q510.E Q511.E Q512.E Q513.E Q514.E Q515.E Q516.E Q517.E Q518.E Q519.E Q520.E
ROW_13: J2.27 Q521.E Q522.E Q523.E Q524.E Q525.E Q526.E Q527.E Q528.E Q529.E Q530.E Q531.E Q532.E Q533.E Q534.E Q535.E Q536.E Q537.E Q538.E Q539.E Q540.E Q541.E Q542.E Q543.E Q544.E Q545.E Q546.E Q547.E Q548.E Q549.E Q550.E Q551.E Q552.E Q553.E Q554.E Q555.E Q556.E Q557.E Q558.E Q559.E Q560.E
ROW_14: J2.29 Q561.E Q562.E Q563.E Q564.E Q565.E Q566.E Q567.E Q568.E Q569.E Q570.E Q571.E Q572.E Q573.E Q574.E Q575.E Q576.E Q577.E Q578.E Q579.E Q580.E Q581.E Q582.E Q583.E Q584.E Q585.E Q586.E Q587.E Q588.E Q589.E Q590.E Q591.E Q592.E Q593.E Q594.E Q595.E Q596.E Q597.E Q598.E Q599.E Q600.E
ROW_15: J2.31 Q601.E Q602.E Q603.E Q604.E Q605.E Q606.E Q607.E Q608.E Q609.E Q610.E Q611.E Q612.E Q613.E Q614.E Q615.E Q616.E Q617.E Q618.E Q619.E Q620.E Q621.E Q622.E Q623.E Q624.E Q625.E Q626.E Q627.E Q628.E Q629.E Q630.E Q631.E Q632.E Q633.E Q634.E Q635.E Q636.E Q637.E Q638.E Q639.E Q640.E
ROW_16: J2.33 Q641.E Q642.E Q643.E Q644.E Q645.E Q646.E Q647.E Q648.E Q649.E Q650.E Q651.E Q652.E Q653.E Q654.E Q655.E Q656.E Q657.E Q658.E Q659.E Q660.E Q661.E Q662.E Q663.E Q664.E Q665.E Q666.E Q667.E Q668.E Q669.E Q670.E Q671.E Q672.E Q673.E Q674.E Q675.E Q676.E Q677.E Q678.E Q679.E Q680.E
ROW_17: J2.35 Q681.E Q682.E Q683.E Q684.E Q685.E Q686.E Q687.E Q688.E Q689.E Q690.E Q691.E Q692.E Q693.E Q694.E Q695.E Q696.E Q697.E Q698.E Q699.E Q700.E Q701.E Q702.E Q703.E Q704.E Q705.E Q706.E Q707.E Q708.E Q709.E Q710.E Q711.E Q712.E Q713.E Q714.E Q715.E Q716.E Q717.E Q718.E Q719.E Q720.E
ROW_18: J2.37 Q721.E Q722.E Q723.E Q724.E Q725.E Q726.E Q727.E Q728.E Q729.E Q730.E Q731.E Q732.E Q733.E Q734.E Q735.E Q736.E Q737.E Q738.E Q739.E Q740.E Q741.E Q742.E Q743.E Q744.E Q745.E Q746.E Q747.E Q748.E Q749.E Q750.E Q751.E Q752.E Q753.E Q754.E Q755.E Q756.E Q757.E Q758.E Q759.E Q760.E
ROW_19: J2.39 Q761.E Q762.E Q763.E Q764.E Q765.E Q766.E Q767.E Q768.E Q769.E Q770.E Q771.E Q772.E Q773.E Q774.E Q775.E Q776.E Q777.E Q778.E Q779.E Q780.E Q781.E Q782.E Q783.E Q784.E Q785.E Q786.E Q787.E Q788.E Q789.E Q790.E Q791.E Q792.E Q793.E Q794.E Q795.E Q796.E Q797.E Q798.E Q799.E Q800.E
ROW_20: J2.42 Q801.E Q802.E Q803.E Q804.E Q805.E Q806.E Q807.E Q808.E Q809.E Q810.E Q811.E Q812.E Q813.E Q814.E Q815.E Q816.E Q817.E Q818.E Q819.E Q820.E Q821.E Q822.E Q823.E Q824.E Q825.E Q826.E Q827.E Q828.E Q829.E Q830.E Q831.E Q832.E Q833.E Q834.E Q835.E Q836.E Q837.E Q838.E Q839.E Q840.E
ROW_21: J2.44 Q841.E Q842.E Q843.E Q844.E Q845.E Q846.E Q847.E Q848.E Q849.E Q850.E Q851.E Q852.E Q853.E Q854.E Q855.E Q856.E Q857.E Q858.E Q859.E Q860.E Q861.E Q862.E Q863.E Q864.E Q865.E Q866.E Q867.E Q868.E Q869.E Q870.E Q871.E Q872.E Q873.E Q874.E Q875.E Q876.E Q877.E Q878.E Q879.E Q880.E
ROW_22: J2.46 Q881.E Q882.E Q883.E Q884.E Q885.E Q886.E Q887.E Q888.E Q889.E Q890.E Q891.E Q892.E Q893.E Q894.E Q895.E Q896.E Q897.E Q898.E Q899.E Q900.E Q901.E Q902.E Q903.E Q904.E Q905.E Q906.E Q907.E Q908.E Q909.E Q910.E Q911.E Q912.E Q913.E Q914.E Q915.E Q916.E Q917.E Q918.E Q919.E Q920.E
ROW_23: J2.48 Q921.E Q922.E Q923.E Q924.E Q925.E Q926.E Q927.E Q928.E Q929.E Q930.E Q931.E Q932.E Q933.E Q934.E Q935.E Q936.E Q937.E Q938.E Q939.E Q940.E Q941.E Q942.E Q943.E Q944.E Q945.E Q946.E Q947.E Q948.E Q949.E Q950.E Q951.E Q952.E Q953.E Q954.E Q955.E Q956.E Q957.E Q958.E Q959.E Q960.E
ROW_24: J2.50 Q961.E Q962.E Q963.E Q964.E Q965.E Q966.E Q967.E Q968.E Q969.E Q970.E Q971.E Q972.E Q973.E Q974.E Q975.E Q976.E Q977.E Q978.E Q979.E Q980.E Q981.E Q982.E Q983.E Q984.E Q985.E Q986.E Q987.E Q988.E Q989.E Q990.E Q991.E Q992.E Q993.E Q994.E Q995.E Q996.E Q997.E Q998.E Q999.E Q1000.E
ROW_25: J2.52 Q1001.E Q1002.E Q1003.E Q1004.E Q1005.E Q1006.E Q1007.E Q1008.E Q1009.E Q1010.E Q1011.E Q1012.E Q1013.E Q1014.E Q1015.E Q1016.E Q1017.E Q1018.E Q1019.E Q1020.E Q1021.E Q1022.E Q1023.E Q1024.E Q1025.E Q1026.E Q1027.E Q1028.E Q1029.E Q1030.E Q1031.E Q1032.E Q1033.E Q1034.E Q1035.E Q1036.E Q1037.E Q1038.E Q1039.E Q1040.E
ROW_26: J2.54 Q1041.E Q1042.E Q1043.E Q1044.E Q1045.E Q1046.E Q1047.E Q1048.E Q1049.E Q1050.E Q1051.E Q1052.E Q1053.E Q1054.E Q1055.E Q1056.E Q1057.E Q1058.E Q1059.E Q1060.E Q1061.E Q1062.E Q1063.E Q1064.E Q1065.E Q1066.E Q1067.E Q1068.E Q1069.E Q1070.E Q1071.E Q1072.E Q1073.E Q1074.E Q1075.E Q1076.E Q1077.E Q1078.E Q1079.E Q1080.E
ROW_27: J2.56 Q1081.E Q1082.E Q1083.E Q1084.E Q1085.E Q1086.E Q1087.E Q1088.E Q1089.E Q1090.E Q1091.E Q1092.E Q1093.E Q1094.E Q1095.E Q1096.E Q1097.E Q1098.E Q1099.E Q1100.E Q1101.E Q1102.E Q1103.E Q1104.E Q1105.E Q1106.E Q1107.E Q1108.E Q1109.E Q1110.E Q1111.E Q1112.E Q1113.E Q1114.E Q1115.E Q1116.E Q1117.E Q1118.E Q1119.E Q1120.E
ROW_28: J2.58 Q1121.E Q1122.E Q1123.E Q1124.E Q1125.E Q1126.E Q1127.E Q1128.E Q1129.E Q1130.E Q1131.E Q1132.E Q1133.E Q1134.E Q1135.E Q1136.E Q1137.E Q1138.E Q1139.E Q1140.E Q1141.E Q1142.E Q1143.E Q1144.E Q1145.E Q1146.E Q1147.E Q1148.E Q1149.E Q1150.E Q1151.E Q1152.E Q1153.E Q1154.E Q1155.E Q1156.E Q1157.E Q1158.E Q1159.E Q1160.E
ROW_29: J2.60 Q1161.E Q1162.E Q1163.E Q1164.E Q1165.E Q1166.E Q1167.E Q1168.E Q1169.E Q1170.E Q1171.E Q1172.E Q1173.E Q1174.E Q1175.E Q1176.E Q1177.E Q1178.E Q1179.E Q1180.E Q1181.E Q1182.E Q1183.E Q1184.E Q1185.E Q1186.E Q1187.E Q1188.E Q1189.E Q1190.E Q1191.E Q1192.E Q1193.E Q1194.E Q1195.E Q1196.E Q1197.E Q1198.E Q1199.E Q1200.E